# Altium PCB 01SignalDetect.PcbDoc (part 1 of 2)
Units mil, origin at the board's own origin, x right, y up, seen from the top; angles counter-clockwise.
Board outline 5526.23 x 3781.16 mil, 2 copper layers (Top Layer, Bottom Layer); 155 components, 60 nets, 423 pads, 168 vias.
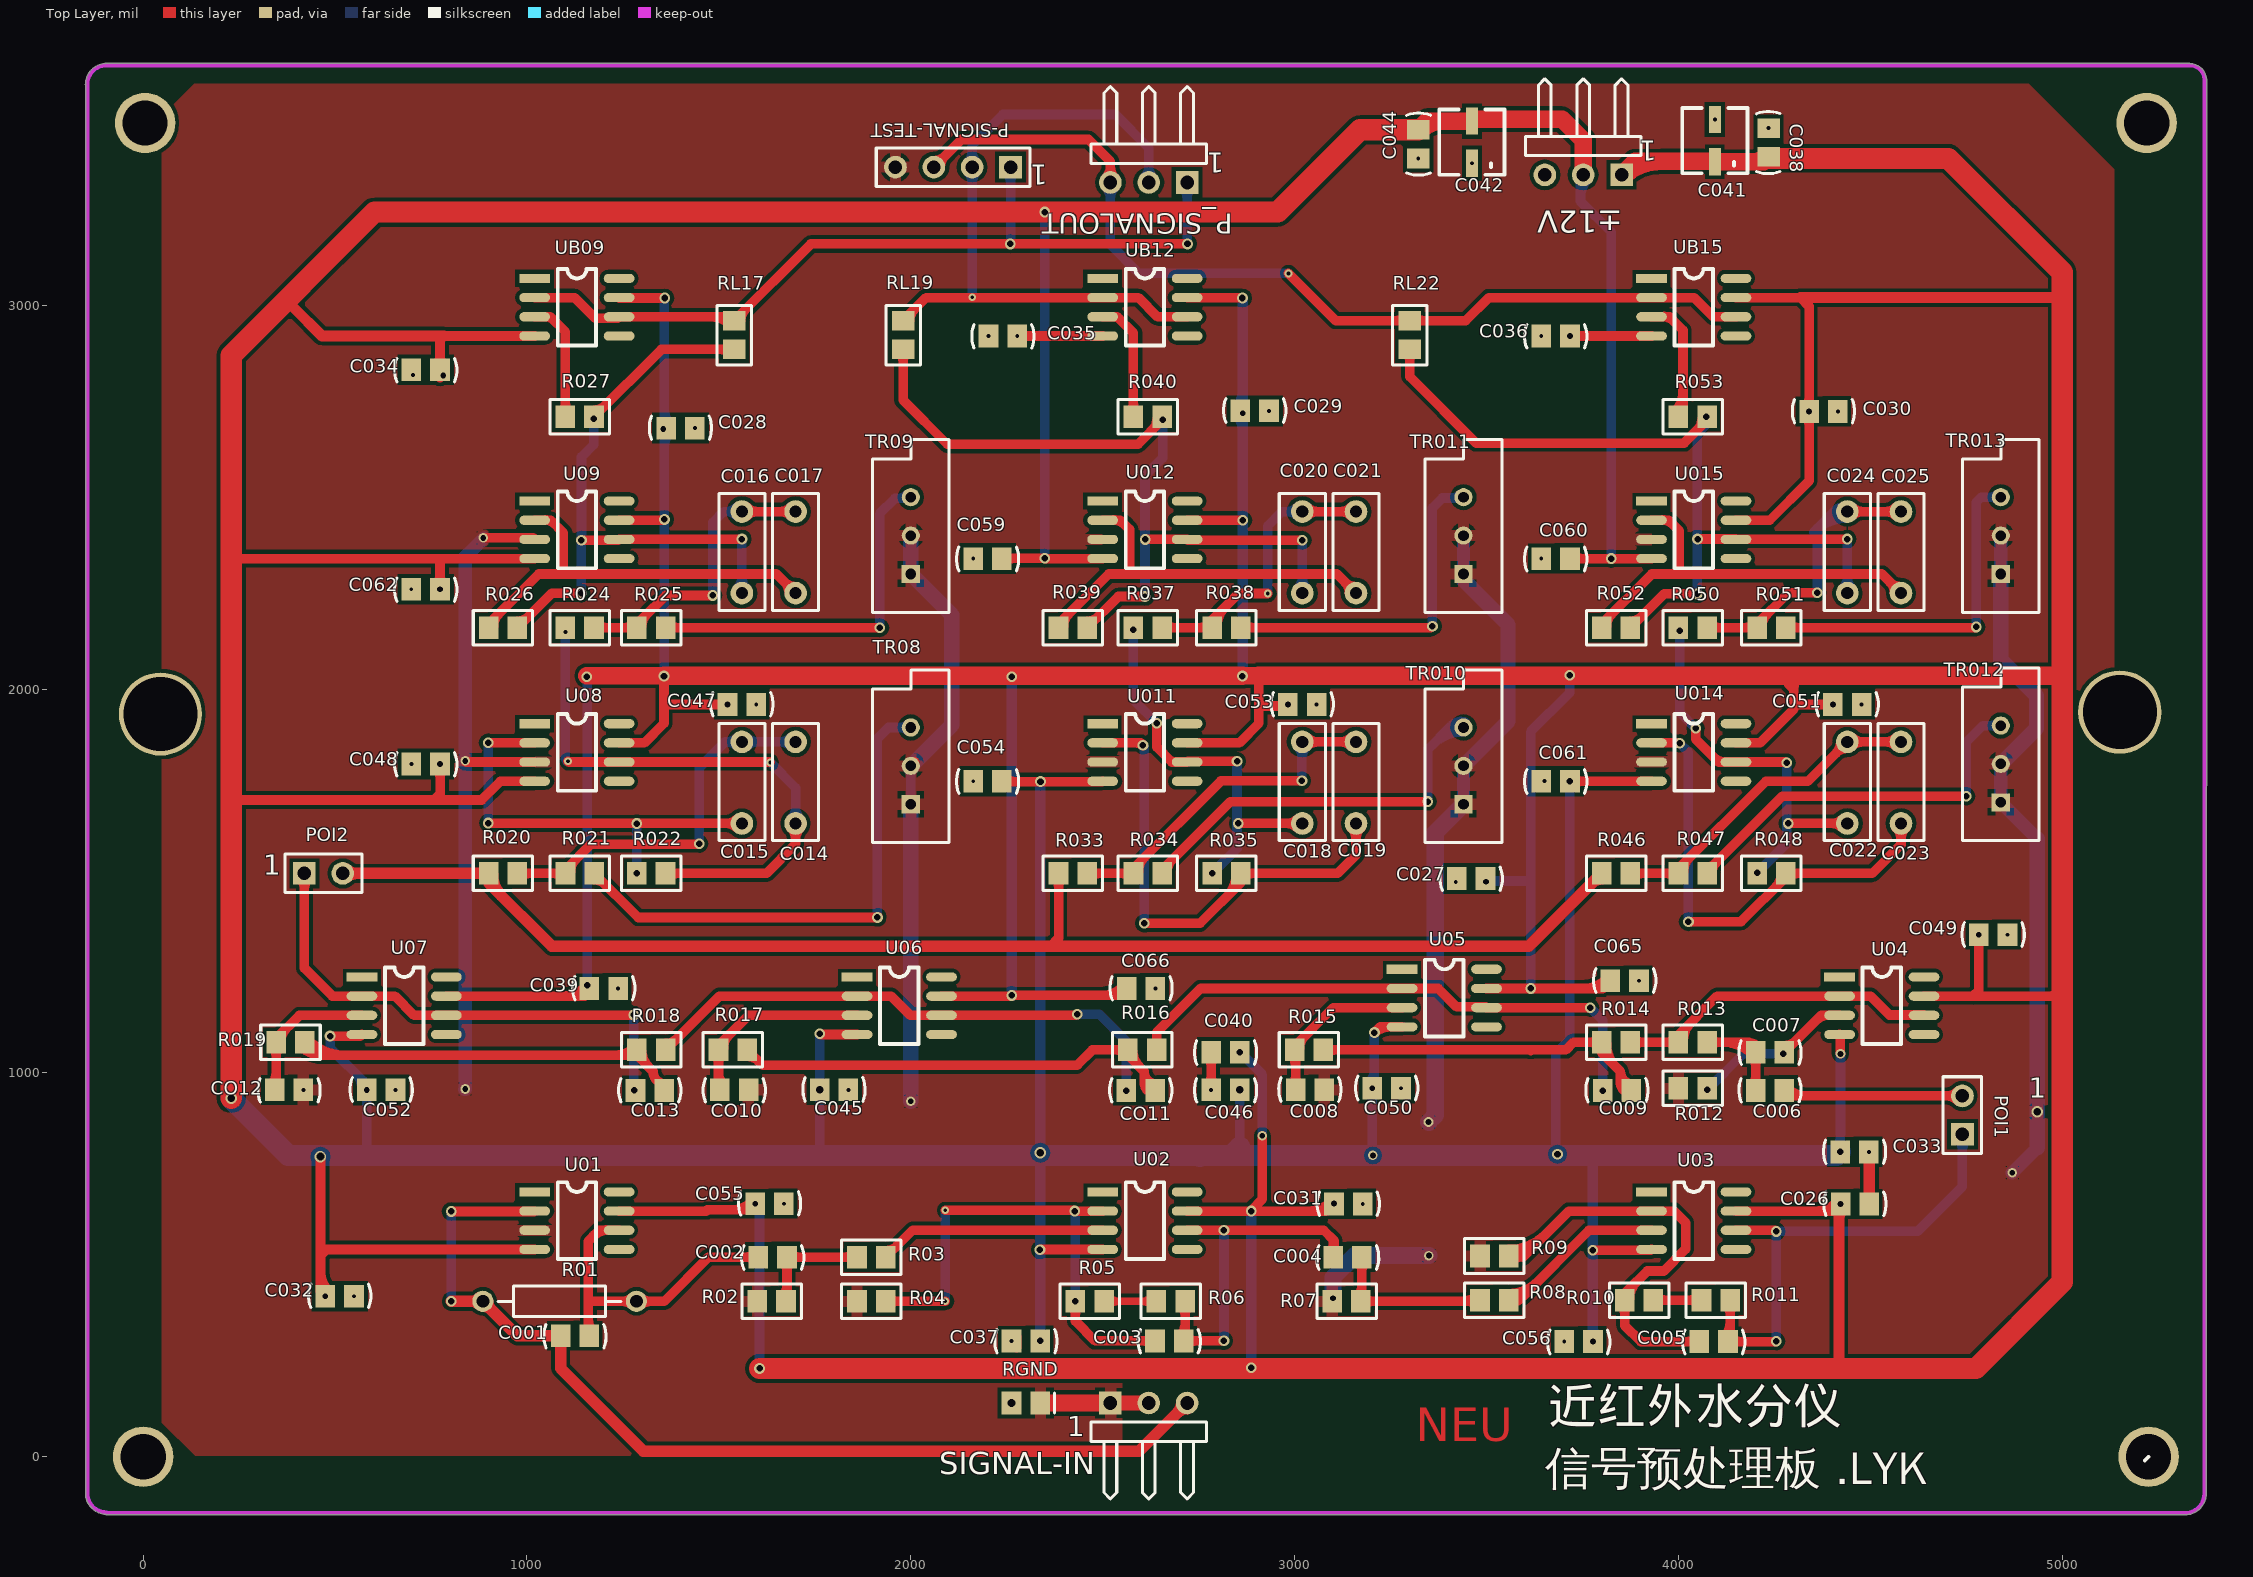
[diagram p0: Top Layer view]
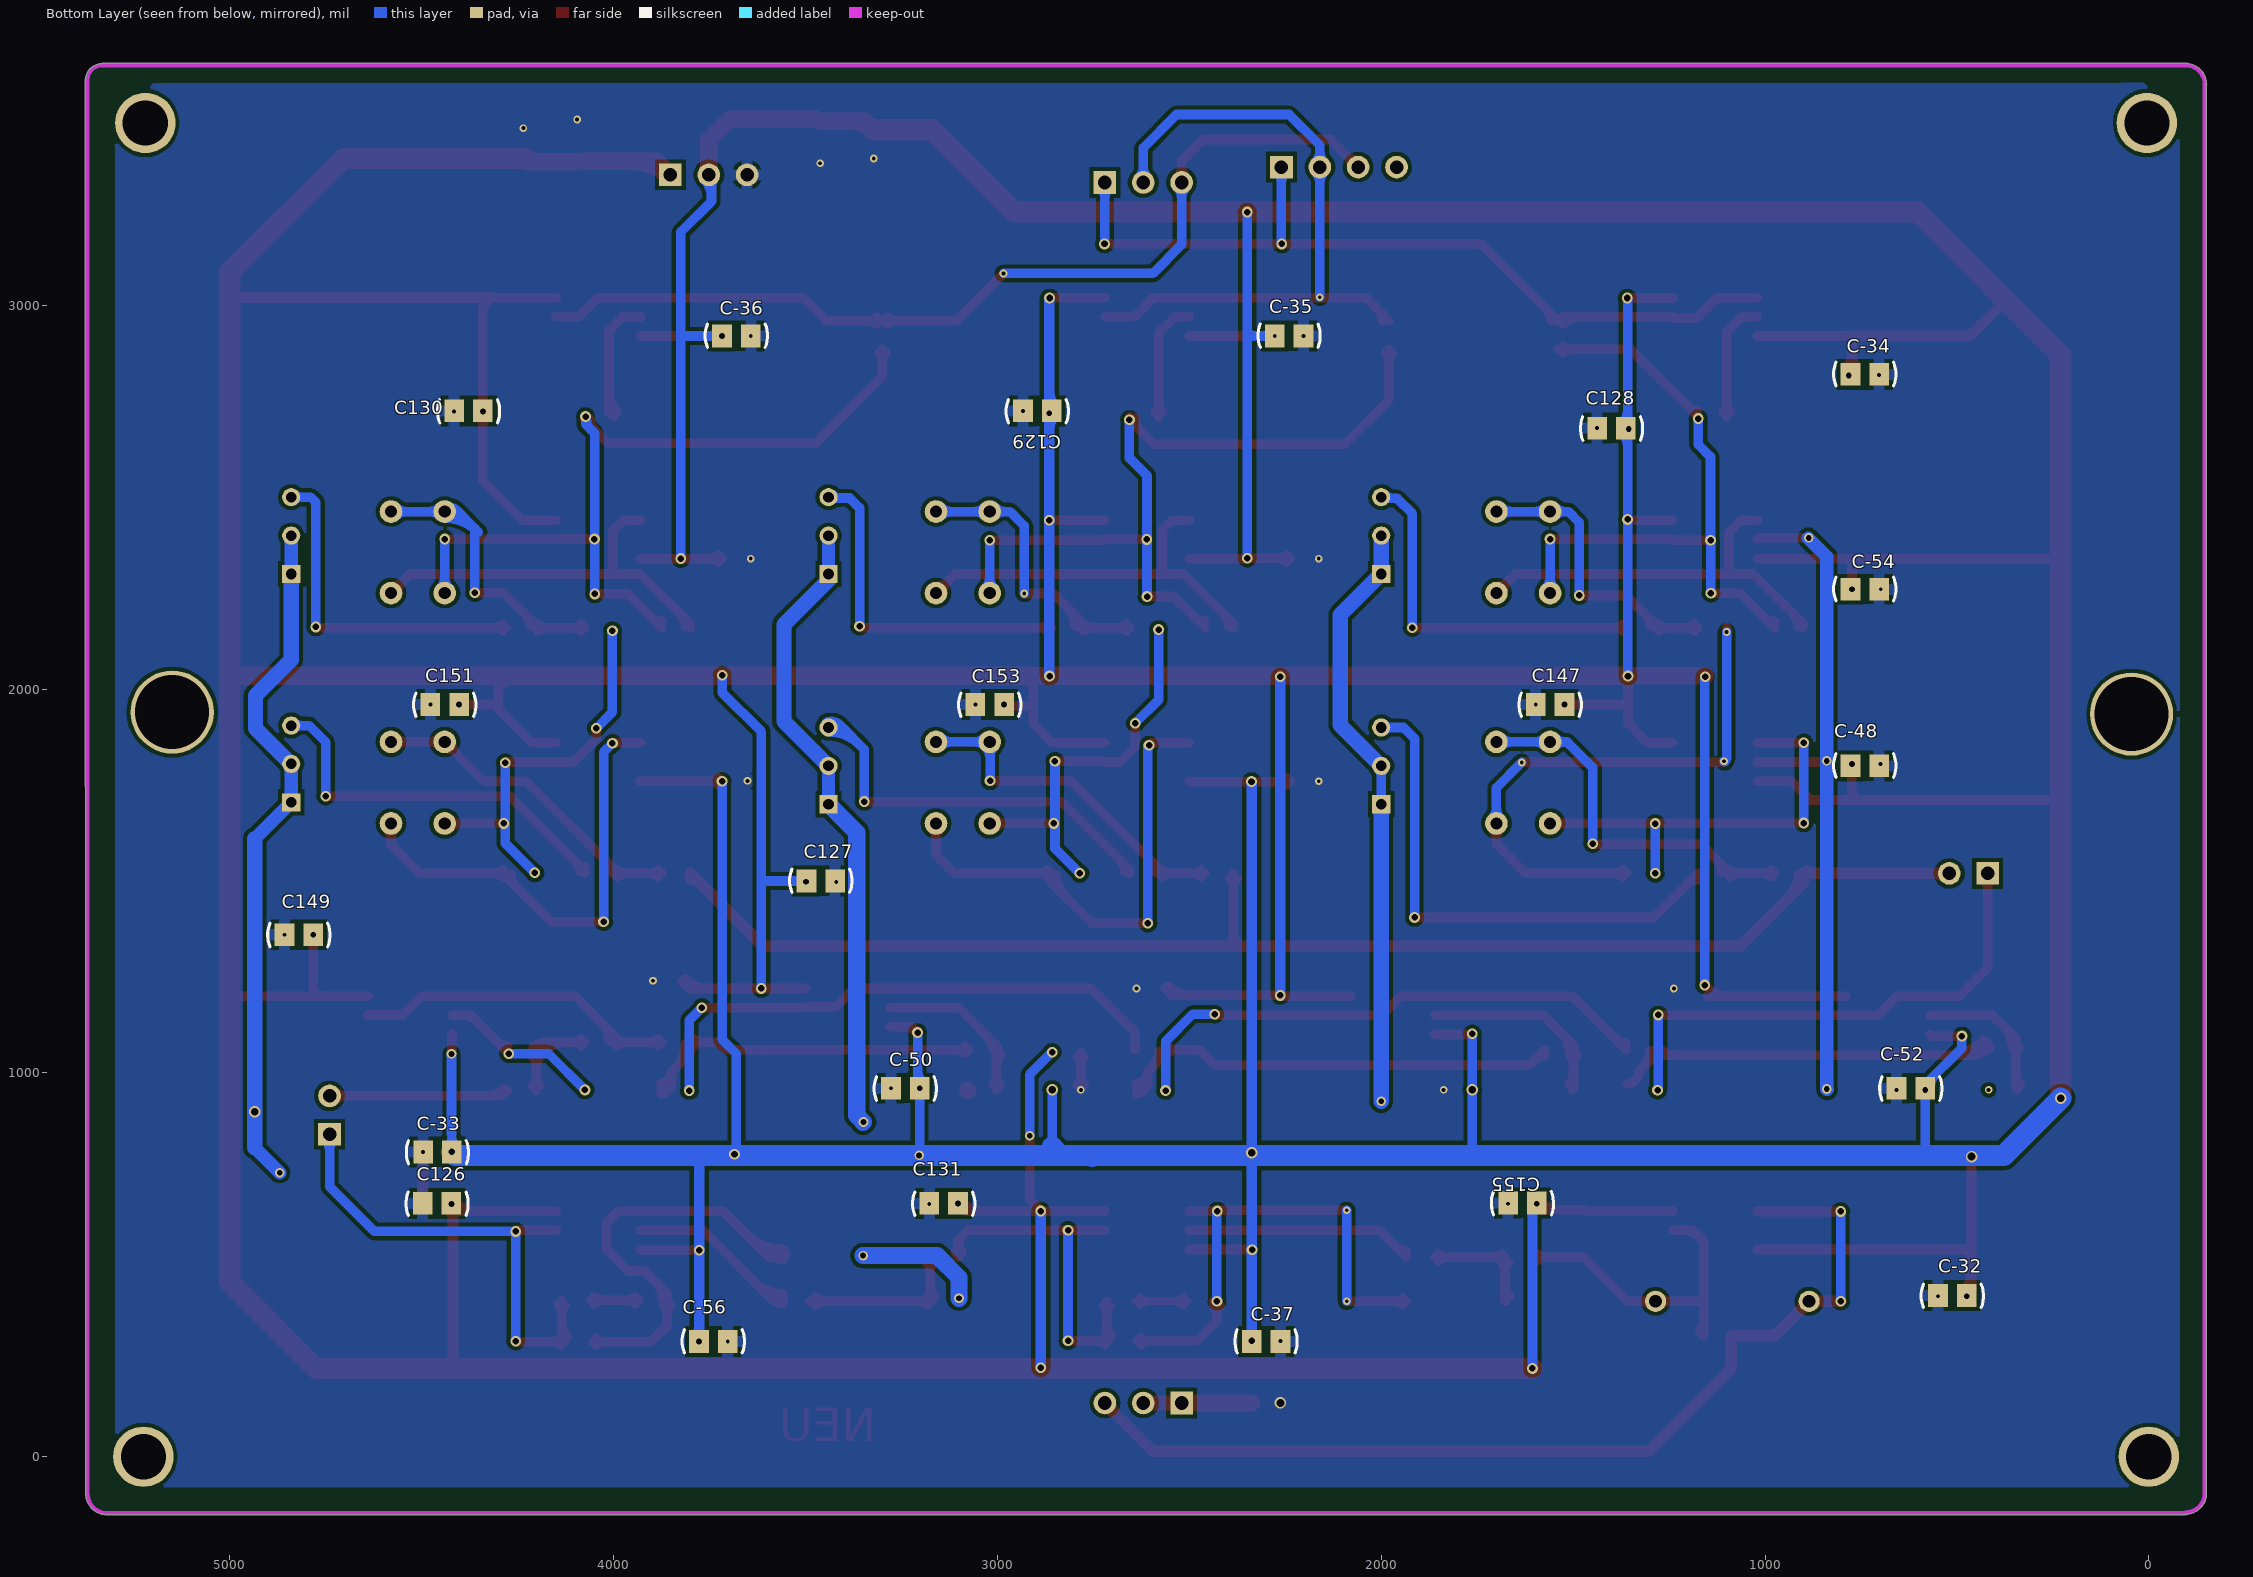
[diagram p1: Bottom Layer view, seen from below]

## Layer stack, top to bottom
Top Layer: signal copper 1.4
Dielectric: dielectric 12.6, FR-4, Dk 4.8
Bottom Layer: signal copper 1.4

## Board outline
-149.99,-100.25 ccw(c-95,-94.75) -98.28,-149.92 ccw(c-95,-146.13) -95,-151.14 5325,-151.14 ccw(c5325,-146.13) 5325.55,-151.11 ccw(c5320,-96.13) 5375.27,-96.13 ccw(c5370.25,-96.13) 5375.27,-96.03 5375.96,3589.41 ccw(c5370.95,3589.49) 5375.96,3589.49 ccw(c5370.95,3589.49) 5375.94,3589.99 ccw(c5331.71,3585.57) 5331.71,3630.02 -100,3630.02 ccw(c-100,3625) -100.5,3629.99 ccw(c-95,3575) -150.26,3575 ccw(c-145.25,3575) -150.02,3573.44 -150.02,-99.75 ccw(c-145,-99.75)

## Design rules (kind name [scope] priority, off if disabled: settings)
Clearance Clearance_3 [InNamedPolygon('Top Layer-d')] p1: gap=10
Clearance Clearance_2 [InNamedPolygon('Top Layer-b')] p2: gap=15
Clearance Clearance_1 [InNamedPolygon('Top Layer-r')] p3: gap=15
Clearance [All] p4: gap=8
HoleSize [All] p1: absolutevalues=TRUE maxlimit=500 minlimit=1 maxpercent=80.000 minpercent=20.000
HoleToHoleClearance [All] p1: gap=8 allowstackedmicrovias=TRUE
MinimumSolderMaskSliver [All] p1: minsoldermaskwidth=8
PolygonConnect [All] p1: connectstyle=Relief reliefconductorwidth=30 reliefentries=4 polygonreliefangle="90 Angle"
RoutingCorners [All] p1: cornerstyle=45-Degree minsetback=10 maxsetback=100
RoutingVias [All] p1: holewidth=10 width=20 viastyle="Through Hole" minholewidth=8 minwidth=10 maxholewidth=50 maxwidth=80
SilkToSilkClearance [All] p1: silktosilkclearance=8
SilkscreenOverComponentPads [All] p1: minsilkscreentomaskgap=5
SolderMaskExpansion [All] p1: expansion=4
TestPointUsage [All] p1: valid=0 allowmultiple=FALSE
Testpoint [All] p1: side=15 testpointundercomponent=TRUE minsize=40 maxsize=100 preferedsize=60 minholesize=0 maxholesize=40 preferedholesize=32 testpointgrid=1 style=1023 order=0123456789
Width [All] p1: maxlimit=100 minlimit=10 preferedwidth=20
18 further rules are at their usual default settings.

## Components (designator, comment, footprint, x,y, rotation, side; value= is the part's Value field where it differs from the comment)
C001 "Cap" CC0805 1125,315 r180 top
C002 "Cap" CC0805 1640,520 r180 top
C003 "Cap" CC0805 2673.62,301.72 r180 top
C004 "Cap" CC0805 3138,520 r180 top
C005 "Cap" CC0805 4091.78,300 r180 top
C006 "Cap" CC0805 4238.78,954 r0 top
C007 "Cap" CC0805 4238.62,1054 r180 top
C008 "Cap" CC0805 3040,955.72 r0 top
C009 "Cap" CC0805 3840,954 r0 top
C013 "Cap" CC0805 1320,954 r0 top
C014 "Cap" 校正电容 1700,1650 r90 top
C015 "Cap" 校正电容 1560,1650 r90 top
C016 "Cap" 校正电容 1560,2250 r90 top
C017 "Cap" 校正电容 1700,2250 r90 top
C018 "Cap" 校正电容 3020,1650 r90 top
C019 "Cap" 校正电容 3160,1650 r90 top
C020 "Cap" 校正电容 3020,2250 r90 top
C021 "Cap" 校正电容 3160,2250 r90 top
C022 "Cap" 校正电容 4440,1650 r90 top
C023 "Cap" 校正电容 4580,1650 r90 top
C024 "Cap" 校正电容 4440,2250 r90 top
C025 "Cap" 校正电容 4580,2250 r90 top
C026 "Cap" CC0805 4460,658.28 r0 top
C027 "Cap" CC0805 3460,1506.72 r180 top
C028 "Cap" CC0805 1400,2680 r0 top
C029 "Cap" CC0805 2896,2725 r0 top
C030 "Cap" CC0805 4378,2723.28 r0 top
C031 "Cap" CC0805 3140,658.28 r0 top
C032 "Cap" CC0805 512,418.28 r0 top
C033 "Cap" CC0805 4459,794 r0 top
C034 "Cap" CC0805 736,2832 r180 top
C035 "Cap" CC0805 2240,2920 r180 top
C036 "Cap" CC0805 3680,2920 r180 top
C037 "Cap" CC0805 2300,301.72 r180 top
C038 "Cap" CC0805 4235,3424.17 r90 top
C039 "Cap" CC0805 1200,1220 r0 top
C040 "Cap" CC0805 2820,1054 r180 top
C041 "Cap Pol1" "4*4.5 贴片电解电容" 4095,3484 r0 top
C042 "Cap Pol1" "4*4.5 贴片电解电容" 3462,3480 r0 top
C044 "Cap" CC0805 3322,3420 r270 top
C045 "Cap" CC0805 1800,955.72 r0 top
C046 "Cap" CC0805 2820,955.72 r180 top
C047 "Cap" CC0805 1560,1960 r0 top
C048 "Cap" CC0805 736.17,1805 r180 top
C049 "Cap" CC0805 4820,1360 r0 top
C050 "Cap" CC0805 3240,960 r0 top
C051 "Cap" CC0805 4440,1960 r0 top
C052 "Cap" CC0805 620,955.72 r0 top
C053 "Cap" CC0805 3020,1960 r0 top
C054 "Cap" CC0805 2200,1760 r180 top
C055 "Cap" CC0805 1632,659.28 r0 top
C056 "Cap" CC0805 3740,300 r180 top
C059 "Cap" CC0805 2200,2340 r180 top
C060 "Cap" CC0805 3680,2340 r180 top
C061 "Cap" CC0805 3680,1760 r180 top
C062 "Cap" CC0805 736,2260 r180 top
C065 "Cap" CC0805 3860,1240 r0 top
C066 "Cap" CC0805 2600,1220 r0 top
C126 "Cap" CC0805 4460,660 r0 bottom
C127 "Cap" CC0805 3460,1500 r180 bottom
C128 "Cap" CC0805 1400,2680 r0 bottom
C129 "Cap" CC0805 2896,2725 r0 bottom
C130 "Cap" CC0805 4378,2725 r0 bottom
C131 "Cap" CC0805 3140,660 r0 bottom
C147 "Cap" CC0805 1560,1960 r0 bottom
C149 "Cap" CC0805 4820,1360 r0 bottom
C151 "Cap" CC0805 4440,1960 r0 bottom
C153 "Cap" CC0805 3020,1960 r0 bottom
C155 "Cap" CC0805 1632,661 r0 bottom
C-32 "Cap" CC0805 512,420 r0 bottom
C-33 "Cap" CC0805 4459,794 r0 bottom
C-34 "Cap" CC0805 740,2820 r180 bottom
C-35 "Cap" CC0805 2240,2920 r180 bottom
C-36 "Cap" CC0805 3680,2920 r180 bottom
C-37 "Cap" CC0805 2300,300 r180 bottom
C-48 "Cap" CC0805 740,1800 r180 bottom
C-50 "Cap" CC0805 3240,960 r0 bottom
C-52 "Cap" CC0805 620,960 r0 bottom
C-54 "Cap" CC0805 740,2260 r180 bottom
C-56 "Cap" CC0805 3740,300 r180 bottom
CO10 "Cap" CC0805 1540,955.72 r180 top
CO11 "Cap" CC0805 2599.24,954 r0 top
CO12 "Cap" CC0805 380,955.72 r180 top
P-SIGNAL-TEST "信号处理输出测试点" HDR1X4 2260,3360 r180 top
P_SIGNALOUT "信号处理输出" HDR1X3H 2720,3320 r180 top
POI1 "FAMP_OUT-FILTER_IN跳针" HDR1X2 4740,840 r90 top
POI2 "FILTER_OUT-PART_IN跳针" HDR1X2 420,1520 r0 top
R01 "Res2" AXIAL-0.4 1085,405 r0 top
R02 "Res2" 0805 1600,405 r0 top
R03 "Res2" 0805 1860,520 r0 top
R04 "Res2" 0805 1860,405 r0 top
R05 "Res2" 0805 2428.9,405 r0 top
R06 "Res2" 0805 2640,405 r0 top
R07 "Res2" 0805 3098,405 r0 top
R08 "Res2" 0805 3483,408 r0 top
R09 "Res2" 0805 3483,523 r0 top
R010 "Res2" 0805 3860,408 r0 top
R011 "Res2" 0805 4060,408 r0 top
R012 "Res2" 0805 4000,960 r0 top
R013 "Res2" 0805 4000,1080 r0 top
R014 "Res2" 0805 3875,1080 r180 top
R015 "Res2" 0805 3000,1060 r0 top
R016 "Res2" 0805 2640.46,1060 r180 top
R017 "Res2" 0805 1573.78,1060 r180 top
R018 "Res2" 0805 1361.22,1060 r180 top
R019 "Res2" 0805 421.38,1080 r180 top
R020 "Res2" 0805 900,1520 r0 top
R021 "Res2" 0805 1175,1520 r180 top
R022 "Res2" 0805 1286.22,1520 r0 top
R024 "Res2" 0805 1100,2160 r0 top
R025 "Res2" 0805 1361.22,2160 r180 top
R026 "Res2" 0805 900,2160 r0 top
R027 "Res2" 0805 1100,2710 r0 top
R033 "Res2" 0805 2385,1520 r0 top
R034 "Res2" 0805 2655,1520 r180 top
R035 "Res2" 0805 2860,1520 r180 top
R037 "Res2" 0805 2580,2160 r0 top
R038 "Res2" 0805 2860,2160 r180 top
R039 "Res2" 0805 2385,2160 r0 top
R040 "Res2" 0805 2580,2710 r0 top
R046 "Res2" 0805 3800,1520 r0 top
R047 "Res2" 0805 4075,1520 r180 top
R048 "Res2" 0805 4280,1520 r180 top
R050 "Res2" 0805 4000,2160 r0 top
R051 "Res2" 0805 4280,2160 r180 top
R052 "Res2" 0805 3800,2160 r0 top
R053 "Res2" 0805 4000,2710 r0 top
RGND "Res2" C0805 2300,140 r180 top
RL17 "Res2" 0805 1540,2960 r270 top
RL19 "Res2" 0805 1980,2960 r270 top
RL22 "Res2" 0805 3300,2960 r270 top
SIGNAL-IN "探测器信号输入" HDR1X3H 2520,140 r0 top
TR08 "RPot" VR5 2000,1800 r90 top
TR09 "RPot" VR5 2000,2400 r90 top
TR010 "RPot" VR5 3440.06,1800 r90 top
TR011 "RPot" VR5 3440,2400 r90 top
TR012 "RPot" VR5 4840,1805 r90 top
TR013 "RPot" VR5 4840,2400 r90 top
U01 "AD8671" SO-8-N 1020,690 r0 top
U02 "OP37EZ" SO-8-N 2500,690 r0 top
U03 "OP37EZ" SO-8-N 3930,690 r0 top
U04 "OP37EZ" SO-8-N 4420,1250 r0 top
U05 "OP37EZ" SO-8-N 3280,1270 r0 top
U06 "OP37EZ" SO-8-N 1860,1250 r0 top
U07 "OP37EZ" SO-8-N 570,1250 r0 top
U08 "OP37EZ" SO-8-N 1020,1910 r0 top
U09 "OP37EZ" SO-8-N 1020,2490 r0 top
U011 "OP37EZ" SO-8-N 2500,1910 r0 top
U012 "OP37EZ" SO-8-N 2500,2490 r0 top
U014 "OP37EZ" SO-8-N 3930,1910 r0 top
U015 "OP37EZ" SO-8-N 3930,2490 r0 top
UB09 "OP37EZ" SO-8-N 1020,3070 r0 top
UB12 "OP37EZ" SO-8-N 2500,3070 r0 top
UB15 "OP37EZ" SO-8-N 3930,3070 r0 top
±12V "信号处理板连接" HDR1X3H 3852,3340 r180 top

## Footprints (in the part's own frame and the unit in brackets; to place one, negate y for a bottom-side part, rotate by r counter-clockwise, add the part's x,y. Pads: shape width x height; smd on the part's side, far side on the other; paste and mask are expansions set on the pad)
"4*4.5 贴片电解电容" [mm] "10uf-16V / 25V铝电解电容"
  rect 0.8x1.8 smd: 1(0,-2.794) 2(0,0)
  silkscreen extent -2.16,-3.56 2.16,0.76
0805 [mm]
  rect 1.3x1.5 smd: 1(0,0) 2(1.9,0)
  silkscreen extent -1.02,-1.14 2.92,1.14
AXIAL-0.4 [mm] "Resistor; 2 Leads"
  round 1.4 hole 0.85: 1(-5.08,0) 2(5.08,0)
  silkscreen extent -4.06,-1.02 4.06,1.02
C0805 [mm] "Chip Capacitor; Body 2.0 x 1.2 mm (LxW typ)"
  rect 1.3x1.5 smd: 1(-0.95,0) 2(0.95,0)
  silkscreen extent -1.9,-0.65 -1.9,0.65
CC0805 [mm] "贴片电容"
  rect 1.3x1.5 smd: 1(-0.95,0) 2(0.95,0)
  silkscreen extent -2.06,-0.76 2.06,0.81, body extent -1.27,-0.64 1.27,0.64, height 0.9
HDR1X2 [mm] "Connector; Header; 2 Position"
  rect 1.5x1.5 hole 0.9: 1(0,0)
  round 1.5 hole 0.9: 2(2.54,0)
  silkscreen extent -1.27,-1.27 3.81,1.27
HDR1X3H [mm] "Connector; Header; 3 Position; Right Angle"
  rect 1.5x1.5 hole 0.9: 1(0,0)
  round 1.5 hole 0.9: 2(2.54,0) 3(5.08,0)
  silkscreen extent -1.27,-6.35 6.35,-1.27
HDR1X4 [mm] "Connector; Header; 4 Position"
  rect 1.5x1.5 hole 0.9: 1(0,0)
  round 1.5 hole 0.9: 2(2.54,0) 3(5.08,0) 4(7.62,0)
  silkscreen extent -1.27,-1.27 8.89,1.27
SO-8-N [mil]
  rect 80x24 smd: 1(0,0)
  oval 80x24 smd: 2(0,-50) 3(0,-100) 4(0,-150) 5(220,-150) 6(220,-100) 7(220,-50) 8(220,0)
  silkscreen extent 60,-175 160,25
VR5 [mm] "Potentiometer; 3 Leads"
  rect 1.2x1.2 hole 0.7: 1(-2.54,0)
  round 1.2 hole 0.7: 2(0,0) 3(2.54,0)
  silkscreen extent -5.08,-2.54 6.35,2.54
校正电容 [mm]
  round 1.5 hole 0.8: 1(0,0) 2(5.4,0)
  silkscreen extent -1.14,-1.52 6.6,1.52

## Part data
C001 C002 C003 C004 C005 C006 C007 C008 C009 C013 C014 C015 C016 C017 C018 C019 C020 C021 C022 C023 C024 C025 C026 C027 C028 C029 C030 C031 C032 C033 C034 C035 C036 C037 C038 C039 C040 C044 C045 C046 C047 C048 C049 C050 C051 C052 C053 C054 C055 C056 C059 C060 C061 C062 C065 C066 C126 C127 C128 C129 C130 C131 C147 C149 C151 C153 C155 C-32 C-33 C-34 C-35 C-36 C-37 C-48 C-50 C-52 C-54 C-56 CO10 CO11 CO12: "Capacitor"
C041 C042: "Polarized Capacitor (Radial)"
P-SIGNAL-TEST: library part "Header 4", "Header, 4-Pin"
P_SIGNALOUT SIGNAL-IN ±12V: library part "Header 3H", "Header, 3-Pin, Right Angle"
POI1 POI2: library part "Header 2", "Header, 2-Pin"
R01 R02 R03 R04 R05 R06 R07 R08 R09 R010 R011 R012 R013 R014 R015 R016 R017 R018 R019 R020 R021 R022 R024 R025 R026 R027 R033 R034 R035 R037 R038 R039 R040 R046 R047 R048 R050 R051 R052 R053 RGND RL17 RL19 RL22: "Resistor"
TR08 TR09 TR010 TR011 TR012 TR013: "Potentiometer"
U01: library part OP27FJ, "Low-Noise, Precision Operational Amplifier"
U02 U03 U04 U05 U06 U07 U08 U09 U011 U012 U014 U015 UB09 UB12 UB15: "Low-Noise, Precision, High-Speed Operational Amplifier (Avcl >= 5)"

## Free pads (board coordinates)
  round 157.48 hole 118.11: 0(0,0) 1(5,3475) 2(5225,0) 3(5220,3475)
  round 216.54 hole 192.91: 4(45,1935) 5(5150,1940)

## Via types
v1: diameter 28, hole 17, Top Layer to Bottom Layer, 87 vias
v2: diameter 20, hole 10, Top Layer to Bottom Layer, 44 vias
v3: diameter 25, hole 15, Top Layer to Bottom Layer, 30 vias
v4: diameter 30, hole 20, Top Layer to Bottom Layer, 7 vias

## Nets (pads, with @x,y where several pads share a name; then routed paths per layer and width w, separated by ;. In a path a pad name is that pad's centre, name@x,y a point inside that pad or via, vN(x,y) a via of type N, cw(c..) or ccw(c..) an arc to the next point about the centre after c; other vN are vias at no path point)
AGND: C008.2 CO10.1 CO12.1 P-SIGNAL-TEST.4 R02.1 R04.1 R07.1 R09.1 R012.1 RGND.1 SIGNAL-IN.1 SIGNAL-IN.2 TR08.1 TR08.2 TR09.1 TR09.2 TR010.1 TR010.2 TR011.1 TR011.2 TR012.1 TR012.2 TR013.1 TR013.2 U01.3 U08.3 U09.3 U011.3 U012.3 U014.3 U015.3 | length 8708.4
  Top Layer w25: v3(839,1813) 842,1810 U08.3@1020,1810 ; v3(886,2394) 1016,2394 U09.3@1020,2390 ; TR08.2@2000,1800 TR08.2@2010,1810 ; 2561.11,140 cw(c2561.11,181.11) 2532.04,152.04 ccw(c2561.11,181.11) 2561.11,140 ; 2561.11,140 ccw(c2561.11,98.89) 2532.04,127.96 cw(c2561.11,98.89) 2561.11,140 ; 2578.89,140 cw(c2578.89,98.89) 2607.96,127.96 ccw(c2578.89,98.89) 2578.89,140 ; 2578.89,140 ccw(c2578.89,181.11) 2607.96,152.04 cw(c2578.89,181.11) 2578.89,140
  Top Layer w40: SIGNAL-IN.1@2520,140 SIGNAL-IN.2@2620,140
  Top Layer w45: RGND.1@2337.4,140 SIGNAL-IN.1@2520,140 ; C008.2@3077.4,952.6 C008.2@3077.4,955.72
  Bottom Layer w25: v3(886,2394) v3@887,2393 ; v3(2000,926) v3@2004,922 ; TR08.1@2000,1700 TR08.2@2000,1800 ; 2000,1726.85 cw(c1973.15,1726.85) 1992.14,1707.86 ccw(c1973.15,1726.85) 2000,1726.85 ; 2000,1726.85 ccw(c2026.85,1726.85) 2007.87,1707.86 cw(c2026.85,1726.85) 2000,1726.85 ; 2000,1773.15 cw(c2026.85,1773.15) 2007.87,1792.14 ccw(c2026.85,1773.15) 2000,1773.15 ; 2000,1773.15 ccw(c1973.15,1773.15) 1992.14,1792.14 cw(c1973.15,1773.15) 2000,1773.15 ; 2000,2326.85 cw(c1973.15,2326.85) 1992.14,2307.86 ccw(c1973.15,2326.85) 2000,2326.85 ; 2000,2326.85 ccw(c2026.85,2326.85) 2007.87,2307.86 cw(c2026.85,2326.85) 2000,2326.85 ; 2000,2373.15 cw(c2026.85,2373.15) 2007.87,2392.14 ccw(c2026.85,2373.15) 2000,2373.15 ; 2000,2373.15 ccw(c1973.15,2373.15) 1992.14,2392.14 cw(c1973.15,2373.15) 2000,2373.15 ; 3440,2326.85 cw(c3413.15,2326.85) 3432.14,2307.86 ccw(c3413.15,2326.85) 3440,2326.85 ; 3440,2326.85 ccw(c3466.85,2326.85) 3447.87,2307.86 cw(c3466.85,2326.85) 3440,2326.85 ; 3440,2373.15 cw(c3466.85,2373.15) 3447.87,2392.14 ccw(c3466.85,2373.15) 3440,2373.15 ; 3440,2373.15 ccw(c3413.15,2373.15) 3432.14,2392.14 cw(c3413.15,2373.15) 3440,2373.15 ; 3440.06,1726.85 cw(c3413.21,1726.85) 3432.2,1707.86 ccw(c3413.21,1726.85) 3440.06,1726.85 ; 3440.06,1726.85 ccw(c3466.91,1726.85) 3447.93,1707.86 cw(c3466.91,1726.85) 3440.06,1726.85 ; 3440.06,1773.15 cw(c3466.91,1773.15) 3447.93,1792.14 ccw(c3466.91,1773.15) 3440.06,1773.15 ; 3440.06,1773.15 ccw(c3413.21,1773.15) 3432.2,1792.14 cw(c3413.21,1773.15) 3440.06,1773.15 ; 4840,1731.85 cw(c4813.15,1731.85) 4832.14,1712.86 ccw(c4813.15,1731.85) 4840,1731.85 ; 4840,1731.85 ccw(c4866.85,1731.85) 4847.87,1712.86 cw(c4866.85,1731.85) 4840,1731.85 ; 4840,1778.15 cw(c4866.85,1778.15) 4847.87,1797.14 ccw(c4866.85,1778.15) 4840,1778.15 ; 4840,1778.15 ccw(c4813.15,1778.15) 4832.14,1797.14 cw(c4813.15,1778.15) 4840,1778.15 ; 4840,2326.85 cw(c4813.15,2326.85) 4832.14,2307.86 ccw(c4813.15,2326.85) 4840,2326.85 ; 4840,2326.85 ccw(c4866.85,2326.85) 4847.87,2307.86 cw(c4866.85,2326.85) 4840,2326.85 ; 4840,2373.15 cw(c4866.85,2373.15) 4847.87,2392.14 ccw(c4866.85,2373.15) 4840,2373.15 ; 4840,2373.15 ccw(c4813.15,2373.15) 4832.14,2392.14 cw(c4813.15,2373.15) 4840,2373.15
  Bottom Layer w35: v3@838,957 v3(839,958) v3(839,1813) 839,2345 v3@887,2393 ; TR011.1@3440,2284 TR011.1@3440,2300 TR011.2@3440,2400 ; TR010.1@3440.06,1700 TR010.2@3440.06,1800 ; TR012.2@4840,1805 TR012.1@4840,1705 4935,1610 ; TR013.1@4840,2300 TR013.2@4840,2400 ; v3(4870,740) 4935,805
  Bottom Layer w40: v3(2000,926) TR08.1@2000,1700 ; TR08.2@2000,1800 2107,1907 2107,2193 TR09.1@2000,2300 TR09.2@2000,2400 ; TR011.1@3440,2284 3556,2168 3556,1915.94 TR010.2@3440.06,1800 ; TR012.2@4840,1805 4933,1898 4933,1983 4840,2076 TR013.1@4840,2300 ; 4935,805 4935,1610
  Bottom Layer w45: v3(3100,413) 3100,467 3157,524 v3(3350,524) ; v3@3350,871 v3(3349,872) 3366.51,889.51 3366.51,1626.44 TR010.1@3440.06,1700
  other v2: 417.4,955.72
  other v4: 4935,899
AV+12: C026.1 C027.1 C028.1 C029.1 C030.1 C031.1 C038.1 C039.1 C040.1 C041.1 C047.1 C049.1 C051.1 C053.1 C055.1 C065.1 C066.1 C126.1 C127.1 C128.1 C129.1 C130.1 C131.1 C147.1 C149.1 C151.1 C153.1 C155.1 U01.7 U02.7 U03.7 U04.7 U05.7 U06.7 U07.7 U08.7 U09.7 U011.7 U012.7 U014.7 U015.7 UB09.7 UB12.7 UB15.7 ±12V.1 | length 24745.2
  Top Layer w25: U07.7@790,1200 C039.1@1150,1200 ; 1092.22,1200 ccw(c1092.22,1286.45) C039.1@1153.34,1225.32 ; U01.7@1240,640 1467,640 ; U08.7@1240,1860 1306,1860 1357,1911 1357,1960 ; U09.7@1240,2440 v1@1356,2440 ; UB09.7@1240,3020 1241,3019 v1(1359,3019) ; v1(1357,2034) 1357,1960 ; 1469,642 1470,643 1578.32,643 v3(1594.6,659.28) cw(c1555.3,698.58) 1555.3,643 ; C047.1@1513.34,1950.74 ccw(c1490.99,1928.4) 1490.99,1960 ccw(c1490.99,1991.6) C047.1@1513.34,1969.26 ; v3(1522.6,1960) 1357,1960 ; 1533.2,643 ccw(c1533.2,716.74) C055.1@1585.34,664.6 ; U06.7@2080,1200 v1@2261,1200 ; v1(2263,1202) 2544.6,1202 C066.1@2562.6,1220 ; 2497.04,1202 ccw(c2497.04,1281.62) C066.1@2553.34,1225.32 ; U02.7@2720,640 v1(2887,640) ; U011.7@2720,1860 2856,1860 2907,1911 2907,1956 ; U012.7@2720,2440 v1(2865,2440) ; UB12.7@2720,3020 v1@2863,3020 ; 2907,2035 2907,1956 ; v3(2916,836) 2916,671 2887,642 v1(2887,640) ; 2950.84,1956 ccw(c2950.84,1987.82) C053.1@2973.34,1965.32 ; 2951.15,1956 cw(c2951.15,1924.61) C053.1@2973.34,1946.81 ; v3(2982.6,1960) 2978.6,1956 2907,1956 ; 3036.37,640 ccw(c3036.37,720.57) C031.1@3093.34,663.6 ; v3(3102.6,660) 3082.6,640 v1(2887,640) ; U05.7@3500,1220 v1(3615,1220) 3802.6,1220 C065.1@3822.6,1240 ; 3752.22,1220 ccw(c3752.22,1306.45) C065.1@3813.34,1245.32 ; U03.7@4150,640 C026.1@4404.32,640 ; U014.7@4150,1860 4213,1860 4301,1948 4301,1963 ; U015.7@4150,2440 4238,2440 4340.6,2542.6 v3(4340.6,2723.28) 4340.6,2997.4 4318,3020 UB15.7@4150,3020 ; 4302,2008 4296,2014 4286,2014 4301,1999 4301,1963 ; C030.1@4331.34,2710.09 cw(c4308.99,2687.74) 4340.6,2687.74 cw(c4372.2,2687.74) C030.1@4349.85,2710.09 ; C030.1@4331.34,2736.47 ccw(c4308.99,2758.82) 4340.6,2758.82 ccw(c4372.2,2758.82) C030.1@4349.85,2736.47 ; 4356.37,640 ccw(c4356.37,720.57) C026.1@4413.34,663.6 ; C051.1@4393.34,1950.74 ccw(c4371,1928.4) 4371,1960 ccw(c4371,1991.6) C051.1@4393.34,1969.26 ; v3(4402.6,1960) 4304,1960 4301,1963 ; U04.7@4640,1200 4768,1200 4974,1200 4978,1204 ; 4982,3020 5000,3038
  Top Layer w25.37: C026.1@4418,653.68 v3(4422.6,658.28) ; 4768,1200 4782.6,1214.6 v3(4782.6,1360)
  Top Layer w28: 4318,3020 4982,3020
  Top Layer w28.37: 4418,230 C026.1@4418,653.68 ; 4418,615.71 cw(c4461.23,615.71) C026.1@4430.66,646.28
  Top Layer w45.37: v1@1156,2035 v1@1357,2035 ; v1@2864,2035 2907,2035 ; ±12V.1@3852,3340 3887,3375 4078,3375 ; C041.1@4095,3374 4222.23,3374 C038.1@4235,3386.77 ; ±12V.1@3856.84,3335.16 cw(c3953.02,3238.98) 3953.02,3375 ccw(c3953.02,3238.98) ±12V.1@3856.84,3335.16 ; 4193.23,3374 ccw(c4193.23,3424.6) 4229.01,3388.82 cw(c4193.23,3424.6) 4193.23,3374
  Top Layer w48.37: v1@1357,2035 v1@2864,2035 ; 2907,2035 5000,2035
  Top Layer w55.37: v1(1606,230) 4418,230 4775,230 5000,455 5000,2035 5000,3038 5000,3086 4703.23,3382.77 C038.1@4235,3382.77
  Bottom Layer w25: v1(1157,1229) v1@1157,2031 ; v1@1358,2035 v1(1358,2442) v1@1358,3018 ; 1358,2633.36 cw(c1405.3,2633.36) C128.1@1371.85,2666.81 ; 1358,2726.64 ccw(c1405.3,2726.64) C128.1@1371.85,2693.19 ; v1(2857.4,1054) 2916,995.4 v3(2916,836) ; v1(3615,1220) 3615,1498 3615,1889 3716.4,1990.4 v1@3716.4,2036
  Bottom Layer w25.37: C155.1@1594.6,661 1606,649.6 v1(1606,230) ; C127.1@3497.4,1500 3613,1500 3615,1498 ; C127.1@3506.53,1490.87 cw(c3528.56,1468.84) 3528.56,1500 cw(c3528.56,1531.16) C127.1@3506.53,1509.13
  Bottom Layer w28: v1(2263,1202) v1(2263,2032) ; C129.1@2850.4,2712.87 cw(c2815.16,2677.63) 2865,2677.63 ; C129.1@2850.4,2737.13 ccw(c2815.16,2772.37) 2865,2772.37 ; v1@2865,2035 v1(2865,2440) v1@2865,3018 ; v1(2887,232) v1(2887,640)
  other v1: 1156,2032 2864,2034 3717,2036 2864,3019
  other v3: 3499,1498 1355,2678 2865,2719
AV-12: C032.1 C033.1 C034.1 C035.1 C036.1 C037.1 C042.2 C044.1 C045.1 C046.1 C048.1 C050.1 C052.1 C054.1 C056.1 C059.1 C060.1 C061.1 C062.1 C-32.1 C-33.1 C-34.1 C-35.1 C-36.1 C-37.1 C-48.1 C-50.1 C-52.1 C-54.1 C-56.1 U01.4 U02.4 U03.4 U04.4 U05.4 U06.4 U07.4 U08.4 U09.4 U011.4 U012.4 U014.4 U015.4 UB09.4 UB12.4 UB15.4 ±12V.2 | length 23265.5
  Top Layer w25: 229.32,1711 758,1711 ; 229.32,2357 246.32,2340 782,2340 ; 462,448.69 ccw(c505.01,448.69) v3(474.6,418.28) 462,430.88 462,524 ; 462,484.23 ccw(c536.62,484.23) C032.1@483.85,431.47 ; v4(462,782) 462,524 ; v1(487,1096) 566,1096 U07.4@570,1100 ; C062.1@764.15,2273.19 ccw(c741.8,2295.54) 773.4,2295.54 ccw(c805,2295.54) C062.1@782.66,2273.19 ; C034.1@764.15,2825.19 ccw(c741.8,2847.54) 773.4,2847.54 ccw(c805.01,2847.54) C034.1@782.66,2825.19 ; C034.1@764.15,2845.19 ccw(c741.8,2867.54) 773.4,2867.54 ccw(c805.01,2867.54) C034.1@782.66,2845.19 ; v3(773.4,2260) 773.4,2331.4 782,2340 ; C034.1@773.4,2812 773.4,2909.4 784,2920 UB09.4@1020,2920 ; C034.1@773.4,2837.76 ccw(c802.76,2837.76) v3(782,2817) ; v3(773.57,1805) 773.57,1726.57 758,1711 ; U01.4@1020,540 478,540 462,524 ; U08.4@1020,1760 931,1760 882,1711 758,1711 ; U09.4@1020,2340 782,2340 ; v1@1765,1100 U06.4@1860,1100 ; C054.1@2237.4,1760 2238.4,1759 v1(2338,1759) 2499,1759 U011.4@2500,1760 ; C059.1@2237.4,2340 2238.4,2341 v1(2349,2341) ; C054.1@2246.66,1750.74 cw(c2266.59,1730.81) 2266.59,1759 ; C054.1@2246.66,1769.26 ccw(c2271.42,1794.02) 2271.42,1759 ; C059.1@2246.66,2330.74 cw(c2271.42,2305.98) 2271.42,2341 ; C059.1@2246.66,2349.26 ccw(c2266.59,2369.19) 2266.59,2341 ; C035.1@2286.66,2910.74 cw(c2309.01,2888.4) 2309.01,2920 cw(c2309.01,2951.6) C035.1@2286.66,2929.26 ; C035.1@2291,2920 UB12.4@2500,2920 ; v1@2337.4,540 U02.4@2500,540 ; v1@2350,2340 U012.4@2500,2340 ; v1@3209.06,1103.94 cw(c3247.83,1065.17) U05.4@3247.83,1120 ; U05.4@3244.21,1120 ccw(c3244.21,1068.79) v1(3208,1105) 3223,1120 U05.4@3280,1120 ; v1(3717.4,1760) U014.4@3930,1760 ; C060.1@3717.4,2340 v1(3825,2340) U015.4@3930,2340 ; v3(3717.4,2920) UB15.4@3930,2920 ; C061.1@3726.66,1750.74 cw(c3749,1728.4) 3749,1760 cw(c3749,1791.6) C061.1@3726.66,1769.26 ; C060.1@3726.66,2330.74 cw(c3749,2308.4) 3749,2340 cw(c3749,2371.6) C060.1@3726.66,2349.26 ; C036.1@3726.66,2910.74 cw(c3749.01,2888.4) 3749.01,2920 cw(c3749.01,2951.6) C036.1@3726.66,2929.26 ; v1(3777,538) 3928,538 U03.4@3930,540 ; 773.57,1769.46 cw(c805.17,1769.46) 782.83,1791.81 ccw(c805.17,1769.46) 773.57,1769.46 ; 773.57,1769.46 ccw(c741.97,1769.46) 764.31,1791.81 cw(c741.97,1769.46) 773.57,1769.46
  Top Layer w25.37: U04.4@4420,1100 4422,1098 4422,1050 v3(4422.4,1049.6)
  Top Layer w28: 390,2996 466,2920 784,2920
  Top Layer w45.37: C044.1@3322,3457.4 3344.6,3480 C042.2@3462,3480 ; C042.2@3472,3485 3697,3485 3752,3430 ±12V.2@3752,3340 ; C033.1@4420.6,793 v1(4421.6,794) ; C044.1@3327.99,3455.35 cw(c3387.51,3395.83) 3387.51,3480 ccw(c3387.51,3395.83) C044.1@3327.99,3455.35
  Top Layer w55.37: v4(229.32,933.68) 229.32,1711 229.32,2357 229.32,2869.32 602.79,3242.79 v1(2349,3242.79) 2956,3242.79 3170.61,3457.4 C044.1@3322,3457.4
  Bottom Layer w25: v1(487,1096) 487,1065 582.6,969.4 C-52.1@582.6,960 v3(582.6,955.72) ; 556.39,995.61 cw(c524.71,963.94) C-52.1@569.51,963.94 ; C-52.1@572.92,979.08 cw(c549.57,955.72) v3(582.6,955.72) ; 584,785 582.6,786.4 v3(582.6,955.72) ; 1758,785 1762.6,789.6 v4(1762.6,955.72) 1762.6,1101.6 v1(1763,1102) ; C-35.1@2286.66,2910.74 cw(c2309,2888.4) 2309,2920 cw(c2309,2951.6) C-35.1@2286.66,2929.26 ; C-35.1@2300,2920 2337,2920 2349,2932 ; v1(2349,2341) 2349,2932 ; v1(2349,3242.79) 2349,2932 ; C-50.1@3193.34,973.19 ccw(c3157.95,1008.58) 3208,1008.58 ; v3(3204,785) 3202.6,786.4 v3(3202.6,960) ; C-50.1@3208,973.04 cw(c3189.56,973.04) v3(3202.6,960) ; v1(3208,1105) 3208,965.4 v3(3202.6,960) ; v1(3685,788) 3680,793 3680,1050 3717.4,1087.4 v1(3717.4,1760) ; v3(3717.4,2920) 3823,2920 3825,2922 ; C-36.1@3726.66,2910.74 cw(c3749,2888.4) 3749,2920 cw(c3749,2951.6) C-36.1@3726.66,2929.26 ; 3745,3281.99 cw(c3810.01,3281.99) ±12V.2@3764.04,3327.96 ; ±12V.2@3752,3340 3745,3333 3745,3271 3825,3191 3825,2922 ; C-56.1@3777,300.4 v3(3777.4,300) ; v1(3825,2340) 3825,2922
  Bottom Layer w25.37: 2857.4,806.4 v4(2857.4,955.72) ; C-33.1@4412.47,807.06 ccw(c4390.44,829.09) 4421.6,829.09 ccw(c4452.76,829.09) C-33.1@4430.72,807.06 ; v3(4422.4,1049.6) 4422.6,1049.6 4422.6,840
  Bottom Layer w28: C-37.1@2329.21,312.13 ccw(c2309.42,331.92) 2337.4,331.92 ccw(c2365.38,331.92) C-37.1@2345.6,312.13 ; 2337,862 v1@2337,1758 ; v1(2337.4,301.72) 2337.4,785 v4(2337.4,792) 2337.4,861.6 ; C-56.1@3769.21,312.13 ccw(c3750.39,330.95) 3777,330.95 ; C-56.1@3777,300.4 v1(3777,538) 3777,785 ; 3777,332.89 ccw(c3806.35,332.89) C-56.1@3785.6,312.13
  Bottom Layer w55.37: v4(229.32,933.68) 378,785 584,785 1758,785 2337.4,785 2751,785 ; 2753,783 2751,785 ; 2857.4,806.4 2836,785 ; v3@3202.6,786.4 3201.2,785 2836,785 ; v3(3204,785) 3777,785 4412.6,785 v1(4421.6,794) ; 2751,785 2836,785
  other v1: 2336.4,539
  other v2: 2277.4,2920
FAMP_OUT: C005.1 POI1.1 R011.2 U03.6 | length 1502
  Top Layer w25: C005.1@4119.93,313.19 ccw(c4084.02,349.1) 4134.8,349.1 ; R011.2@4125.55,394.81 cw(c4103.2,372.46) 4134.8,372.46 cw(c4166.41,372.46) R011.2@4144.06,394.81 ; R011.2@4134.8,408 4134.8,305.62 C005.1@4129.19,300 4254,300 v1(4255,301) ; C005.1@4138.44,290.74 cw(c4160.79,268.4) 4160.79,300 cw(c4160.79,331.6) C005.1@4138.44,309.26 ; U03.6@4150,590 4252,590 v1(4255,587)
  Bottom Layer w25: v1(4255,301) v1(4255,587) 4623,587 4740,704 POI1.1@4740,840 ; POI1.1@4727.96,827.96 cw(c4698.89,798.89) 4740,798.89 cw(c4781.11,798.89) POI1.1@4752.04,827.96
FILTER_IN: C006.2 POI1.2 | length 702.4
  Top Layer w25: C006.2@4276.19,954 4290.19,940 POI1.2@4740,940 ; 4698.89,940 cw(c4698.89,898.89) 4727.96,927.96 ccw(c4698.89,898.89) 4698.89,940 ; 4698.89,940 ccw(c4698.89,981.11) 4727.96,952.04 cw(c4698.89,981.11) 4698.89,940 ; C006.2@4285.44,959.32 ccw(c4332.08,1005.96) 4332.08,940 cw(c4332.08,1005.96) C006.2@4285.44,959.32
FILTER_OUT: C013.1 POI2.1 U07.2 U07.6 | length 1482.9
  Top Layer w25: POI2.1@420,1520 420,1273 493,1200 U07.2@570,1200 656,1200 706,1150 U07.6@790,1150 1278,1150 v1(1278,1151) ; 420,1478.89 cw(c461.11,1478.89) 432.04,1507.96 ccw(c461.11,1478.89) 420,1478.89 ; 420,1478.89 ccw(c378.89,1478.89) 407.96,1507.96 cw(c378.89,1478.89) 420,1478.89
  Bottom Layer w25: v1(1278,1151) 1278,957 v1(1280,955)
GROUPGND: C026.2 C027.2 C028.2 C029.2 C030.2 C031.2 C032.2 C033.2 C034.2 C035.2 C036.2 C037.2 C038.2 C039.2 C040.2 C041.2 C042.1 C044.2 C045.2 C046.2 C047.2 C048.2 C049.2 C050.2 C051.2 C052.2 C053.2 C054.2 C055.2 C056.2 C059.2 C060.2 C061.2 C062.2 C065.2 C066.2 C126.2 C127.2 C128.2 C129.2 C130.2 C131.2 C147.2 C149.2 C151.2 C153.2 C155.2 C-32.2 C-33.2 C-34.2 C-35.2 C-36.2 C-37.2 C-48.2 C-50.2 C-52.2 C-54.2 C-56.2 RGND.2 ±12V.3 | length 459.6
  Top Layer w25: C037.2@2275.69,284.69 C037.2@2275.69,312.77 ; v2(2782.6,955.72) C040.2@2782.6,1054 ; 2782.6,991.26 cw(c2750.99,991.26) 2773.34,968.91 ccw(c2750.99,991.26) 2782.6,991.26 ; 2782.6,991.26 ccw(c2814.2,991.26) 2791.85,968.91 cw(c2814.2,991.26) 2782.6,991.26 ; 2782.6,1018.46 cw(c2814.2,1018.46) 2791.85,1040.81 ccw(c2814.2,1018.46) 2782.6,1018.46 ; 2782.6,1018.46 ccw(c2750.99,1018.46) 2773.34,1040.81 cw(c2750.99,1018.46) 2782.6,1018.46
  Top Layer w30: C026.2@4497.4,658.28 C033.2@4497.4,793
  other v2: 3702.6,300 2262.6,301.72 549.4,418.28 3177.4,658.28 1669.4,659.28 4496.4,794 657.4,955.72 1837.4,955.72 3277.4,960 1237.4,1220 2637.4,1220 3897.4,1240 4857.4,1360 3420,1497 2162.6,1760 3651,1761 698.77,1805 1597.4,1960 3057.4,1960 4477.4,1960 698.6,2260 2162.6,2340 3642.6,2340 1437.4,2680 4415.4,2723.28 2933.4,2725 703,2818 2202.6,2920 3642.6,2920 3462,3370 3322,3382.6 4235,3461.57 4095,3484
  other v4: 2262.6,140
NetC001_1: C001.1 C002.2 R01.2 U01.6 | length 1275.4
  Top Layer w25: C001.1@1162.4,315 1159.8,317.6 1159.8,405 ; U01.6@1240,590 1188,590 1159.8,561.8 1159.8,405 ; R01.2@1274.35,394.35 ccw(c1248.64,368.64) 1248.64,405 ccw(c1248.64,441.36) R01.2@1274.35,415.65 ; R01.2@1295.65,394.35 cw(c1321.36,368.64) 1321.36,405 cw(c1321.36,441.36) R01.2@1295.65,415.65 ; C002.2@1602.6,520 1473,520 1358,405 1159.8,405 ; 1570.99,520 cw(c1570.99,488.4) 1593.34,510.74 ccw(c1570.99,488.4) 1570.99,520 ; 1570.99,520 ccw(c1570.99,551.6) 1593.34,529.26 cw(c1570.99,551.6) 1570.99,520 ; 1159.8,356.81 ccw(c1200.28,356.81) 1171.66,328.19 cw(c1200.28,356.81) 1159.8,356.81 ; 1171.88,573.88 cw(c1212,533.77) 1212,590.5 ccw(c1212,533.77) 1171.88,573.88 ; 1176,578 cw(c1206.9,547.1) 1212.06,590.5 ccw(c1206.9,547.1) 1176,578
NetC001_2: C001.2 R01.1 SIGNAL-IN.3 U01.2 | length 2846.6
  Top Layer w25: v1(803,639) 1019,639 U01.2@1020,640 ; SIGNAL-IN.3@2702.97,140 cw(c2661.86,140) 2690.93,110.93 cw(c2720,81.86) SIGNAL-IN.3@2720,122.97
  Top Layer w30: v1(803,405) R01.1@885,405 975,315 C001.2@1087.6,315 1087.6,230.4 1303.5,14.5 2594.5,14.5 SIGNAL-IN.3@2720,140 ; R01.1@876.12,396.12 ccw(c854.68,374.68) 854.68,405 ccw(c854.68,435.32) R01.1@876.12,413.88 ; R01.1@885,392.44 cw(c885,362.12) 906.44,383.56 cw(c927.88,405) R01.1@897.56,405 ; SIGNAL-IN.3@2705.47,140 cw(c2670.4,140) 2695.2,115.2 cw(c2720,90.4) SIGNAL-IN.3@2720,125.47
  Bottom Layer w25: v1(803,405) v1(803,639)
NetC002_1: C002.1 R02.2 R03.1 | length 660.1
  Top Layer w25: R02.2@1674.8,405 1677.4,407.6 C002.1@1677.4,520 R03.1@1860,520 ; 1677.4,484.46 cw(c1709.01,484.46) 1686.66,506.81 ccw(c1709.01,484.46) 1677.4,484.46 ; 1677.4,484.46 ccw(c1645.8,484.46) 1668.15,506.81 cw(c1645.8,484.46) 1677.4,484.46 ; 1709.01,520 cw(c1709.01,551.6) 1686.66,529.26 ccw(c1709.01,551.6) 1709.01,520 ; 1709.01,520 ccw(c1709.01,488.4) 1686.66,510.74 cw(c1709.01,488.4) 1709.01,520 ; 1828.4,520 cw(c1828.4,488.4) 1850.74,510.74 ccw(c1828.4,488.4) 1828.4,520 ; 1828.4,520 ccw(c1828.4,551.6) 1850.74,529.26 cw(c1828.4,551.6) 1828.4,520 ; R02.2@1665.55,418.19 ccw(c1636.93,446.81) 1677.4,446.81 cw(c1636.93,446.81) R02.2@1665.55,418.19
NetC003_1: C003.1 C004.2 R06.2 U02.6 | length 1169.3
  Top Layer w25: C003.1@2701.76,314.91 ccw(c2670.28,346.4) 2714.8,346.4 ; R06.2@2705.55,391.81 cw(c2683.2,369.46) 2714.8,369.46 cw(c2746.41,369.46) R06.2@2724.06,391.81 ; C003.1@2711.02,301.72 C003.1@2711.3,302 ; R06.2@2714.8,405 2714.8,305.51 C003.1@2711.3,302 ; U02.6@2720,590 v1(2816,590) 3076,590 3103,563 3103,522.4 C004.2@3100.6,520 ; C003.1@2720.27,292.46 cw(c2743.3,269.44) 2743.3,302 ; C003.1@2720.27,310.98 ccw(c2741.95,332.65) 2741.95,302 ; v1(2816,302) C003.1@2711.3,302 ; 3103,549.74 ccw(c3126.4,549.74) 3109.85,533.19 cw(c3132.2,555.54) 3100.6,555.54 cw(c3068.99,555.54) 3091.34,533.19 ccw(c3063.2,561.34) 3103,561.34
  Bottom Layer w25: v1(2816,302) v1(2816,590)
NetC003_2: C003.2 R04.2 R05.1 U02.2 | length 1523.5
  Top Layer w25: R04.2@1934.8,405 v2(2090,405) ; v2(2090,642) 2425,642 v1(2427,640) U02.2@2500,640 ; R05.1@2419.64,391.81 cw(c2397.3,369.46) 2428.9,369.46 cw(c2460.5,369.46) R05.1@2438.16,391.81 ; R05.1@2428.9,405 R05.1@2428.9,402.3 ; R05.1@2437,405 2429.71,402.57 R05.1@2428.9,402.3 ; C003.2@2626.96,292.46 ccw(c2604.61,270.12) 2604.61,301.72 ccw(c2604.61,333.32) C003.2@2626.96,310.98 ; C003.2@2636.21,301.72 2480.42,301.72 2428.9,353.25 R05.1@2428.9,402.3 ; 1966.41,405 cw(c1966.41,436.6) 1944.06,414.26 ccw(c1966.41,436.6) 1966.41,405 ; 1966.41,405 ccw(c1966.41,373.4) 1944.06,395.74 cw(c1966.41,373.4) 1966.41,405
  Bottom Layer w25: v2(2090,405) v2(2090,642) ; v1(2428,405) v1@2428,638
NetC004_1: C004.1 R07.2 R08.1 | length 793.1
  Top Layer w25: C004.1@3175.4,520 3175.4,407.6 R07.2@3172.8,405 R08.1@3488.4,405 ; 3449.13,405 cw(c3449.13,370.2) R08.1@3473.74,394.81 ; 3453.66,405 ccw(c3453.66,433.4) R08.1@3473.74,413.32 ; R08.1@3473.74,398.74 ccw(c3451.4,376.4) 3451.4,408 ccw(c3451.4,439.6) R08.1@3473.74,417.26 ; 3175.4,484.46 cw(c3207.01,484.46) 3184.66,506.81 ccw(c3207.01,484.46) 3175.4,484.46 ; 3175.4,484.46 ccw(c3143.8,484.46) 3166.15,506.81 cw(c3143.8,484.46) 3175.4,484.46 ; 3204.41,405 cw(c3204.41,436.6) 3182.06,414.26 ccw(c3204.41,436.6) 3204.41,405 ; 3204.41,405 ccw(c3204.41,373.4) 3182.06,395.74 cw(c3204.41,373.4) 3204.41,405 ; R07.2@3163.55,418.19 ccw(c3134.93,446.81) 3175.4,446.81 cw(c3134.93,446.81) R07.2@3163.55,418.19
NetC005_2: C005.2 R09.2 R010.1 U03.2 | length 1546.6
  Top Layer w25: R09.2@3551.08,528.89 cw(c3568.13,503.98) 3589.48,525.33 ; R09.2@3551.91,529.41 cw(c3567.84,501.45) 3590.6,524.21 ; R09.2@3557.8,515.03 ccw(c3557.8,592.35) 3612.48,537.67 ; R09.2@3557.8,523 3591.8,523 3594.8,520 3714.8,640 U03.2@3930,640 3989,640 4019,610 4019,541 3962,484 3919,484 3860,425 R010.1@3860,408 3860,342 3902,300 C005.2@4054.38,300 ; R09.2@3557.8,540.03 ccw(c3557.8,677.7) 3655.16,580.35 ; R09.2@3567.06,513.74 cw(c3589.41,491.4) 3589.41,523 cw(c3589.41,554.6) R09.2@3567.06,532.26 ; R010.1@3850.74,394.81 cw(c3828.4,372.46) 3860,372.46 cw(c3891.6,372.46) R010.1@3869.26,394.81 ; R010.1@3873.09,411.94 cw(c3936.23,411.94) 3891.58,456.58 ; C005.2@4045.13,290.74 ccw(c4022.78,268.4) 4022.78,300 ccw(c4022.78,331.6) C005.2@4045.13,309.26
NetC006_1: C006.1 C007.2 R013.2 | length 824.3
  Top Layer w25: R013.2@4074.8,1080 4175.21,1080 C007.2@4201.21,1054 4201.21,954.17 C006.1@4201.38,954 ; 4106.41,1080 cw(c4106.41,1111.6) 4084.06,1089.26 ccw(c4106.41,1111.6) 4106.41,1080 ; 4106.41,1080 ccw(c4106.41,1048.4) 4084.06,1070.74 cw(c4106.41,1048.4) 4106.41,1080 ; 4201.21,1018.46 cw(c4232.82,1018.46) 4210.47,1040.81 ccw(c4232.82,1018.46) 4201.21,1018.46 ; 4201.21,1018.46 ccw(c4169.61,1018.46) 4191.96,1040.81 cw(c4169.61,1018.46) 4201.21,1018.46 ; 4116.35,1080 cw(c4116.35,973.07) 4191.96,1048.68 ccw(c4116.35,973.07) 4116.35,1080 ; C007.2@4176.7,1080 cw(c4176.7,1033.42) 4209.64,1066.36 ccw(c4176.7,1033.42) C007.2@4176.7,1080 ; C007.2@4177.18,1078.03 ccw(c4195.22,1096.07) 4199.18,1070.87 cw(c4195.22,1096.07) C007.2@4177.18,1078.03 ; C006.1@4192.13,967.19 ccw(c4170.18,989.14) 4201.21,989.14 cw(c4170.18,989.14) C006.1@4192.13,967.19 ; 4201.21,989.94 ccw(c4233.39,989.94) 4210.64,967.19 cw(c4233.39,989.94) 4201.21,989.94
NetC007_1: C007.1 R012.2 U04.3 | length 629.4
  Top Layer w25: v1(4074.8,955.8) R012.2@4074.8,960 ; C007.1@4276.02,1054 4372.02,1150 U04.3@4420,1150 ; C007.1@4276.02,1071.03 ccw(c4276.02,1112.14) 4305.09,1083.07 cw(c4276.02,1112.14) C007.1@4276.02,1071.03 ; 4358.74,1136.72 cw(c4392,1103.47) 4392,1150.5 ccw(c4392,1103.47) 4358.74,1136.72 ; 4362.03,1140.01 cw(c4387.91,1114.13) 4392.06,1150.5 ccw(c4387.91,1114.13) 4362.03,1140.01
  Bottom Layer w25: v1(4074.8,955.8) 4169,1050 v1(4273,1050)
NetC008_1: C008.1 R015.1 U05.3 | length 697.2
  Top Layer w25: C008.1@3002.6,955.72 3002.6,1057.4 R015.1@3000,1060 3000,1069.31 3100.69,1170 3201,1170 ; 3173,1170 3201,1170 ; U05.3@3280,1170 3201,1170 ; 3002.6,991.26 cw(c2970.99,991.26) 2993.34,968.91 ccw(c2970.99,991.26) 3002.6,991.26 ; 3002.6,991.26 ccw(c3034.2,991.26) 3011.85,968.91 cw(c3034.2,991.26) 3002.6,991.26 ; R015.1@2990.74,1046.81 cw(c2962.12,1018.19) 3002.6,1018.19 ccw(c2962.12,1018.19) R015.1@2990.74,1046.81 ; R015.1@3013.09,1063.94 cw(c3057.65,1063.94) 3026.14,1095.45 ccw(c3057.65,1063.94) R015.1@3013.09,1063.94
NetC009_1: C009.1 R016.1 U05.2 U05.6 | length 1472.7
  Top Layer w25: R016.1@2640.46,1060 2640.46,1105.46 2755,1220 U05.2@3280,1220 3374,1220 3422,1172 3498,1172 U05.6@3500,1170 3586.6,1170 v1(3770,1170)
  Bottom Layer w25: v1(3770,1170) 3802.6,1137.4 v1(3802.6,954)
NetC009_2: C009.2 R014.2 R015.2 | length 1470.2
  Top Layer w25: R015.2@3074.8,1060 3613,1060 ; 3615,1058 3613,1060 ; C009.2@3877.4,954 3848.69,982.71 3848.69,1004.03 ; 3106.41,1060 cw(c3106.41,1091.6) 3084.06,1069.26 ccw(c3106.41,1091.6) 3106.41,1060 ; 3106.41,1060 ccw(c3106.41,1028.4) 3084.06,1050.74 cw(c3106.41,1028.4) 3106.41,1060 ; 3613,1060 3707,1060 3727,1080 R014.2@3800.2,1080 3800.2,1052.52 3848.69,1004.03 ; 3768.59,1080 cw(c3768.59,1048.4) 3790.94,1070.74 ccw(c3768.59,1048.4) 3768.59,1080 ; 3768.59,1080 ccw(c3768.59,1111.6) 3790.94,1089.26 cw(c3768.59,1111.6) 3768.59,1080 ; 3848.69,1004.03 ccw(c3881.91,1004.03) 3878.68,970.97 cw(c3881.91,1004.03) 3848.69,1004.03 ; R014.2@3813.28,1075.63 ccw(c3894.08,1072.97) 3836.91,1015.8 cw(c3894.08,1072.97) R014.2@3813.28,1075.63 ; 3848.69,976.46 ccw(c3879.21,976.46) 3876.24,946.08 cw(c3879.21,976.46) 3848.69,976.46 ; 3850.66,980.74 ccw(c3874.36,1004.44) 3876.55,971 cw(c3874.36,1004.44) 3850.66,980.74